# EAGLE board connectors (EAGLE 9.2.2)
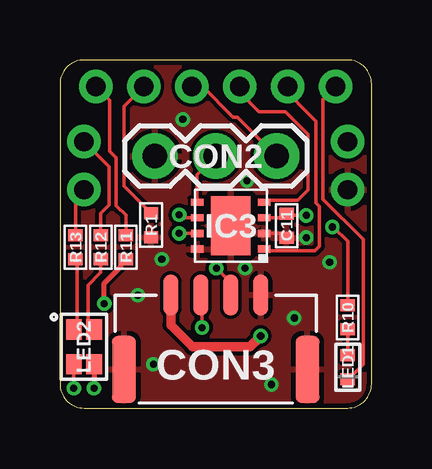
[diagram p0: board, top side]
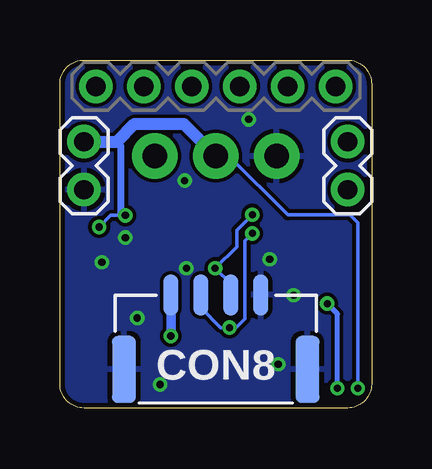
[diagram p1: board, bottom side, seen from below]

Size 13 x 14.5 mm. Coordinates in mm from the lower left corner, seen from the top.
Outline: 12,0 arc90 13,1 13,13.5 arc90 12,14.5 1,14.5 arc90 0,13.5 0,1 arc90 1,0 12,0
Copper layers (1*16): Top 0.035mm / dielectric 0.5mm / Bottom 0.035mm
Design rules "myxa *": minimum track width 0.15mm, minimum drill 0.2mm, track to track 0.15mm, track to pad 0.15mm, pad to pad 0.15mm, via to via 0.15mm, smd to smd 0.15mm, copper to edge 0.2mm, drill to drill 0.2mm, minimum pad ring 0.125mm, minimum via ring 0.125mm, stop-mask expansion 1mil, vias tented up to drill 0.31mm, thermal gap 8mil
Net classes: 1 HV: clearance 0.25 mm to class 0, clearance 0.25 mm

## Footprints (pad centres in the part's own frame; a part is rotated, then mirrored left to right if it is on the bottom)
C0402 = smd 0.5 x 0.6: 1 -0.5,0; 2 0.5,0
1X06-PTH-2 = drill 0.8 pad 1.4: 1 -5,0; 2 -3,0; 3 -1,0; 4 1,0; 5 3,0; 6 5,0
1X03-PTH-2.54-RA = drill 1.016 pad 1.88: 1 -2.54,0; 2 0,0; 3 2.54,0
JST_GH-4P-RA = smd 0.6 x 1.7: 1 1.875,-2.91; 2 0.625,-2.91; 3 -0.625,-2.91; 4 -1.875,-2.91 | smd 1 x 2.8: M$0 -3.825,0.19; M$1 3.825,0.19
1X02-PTH-2 = drill 0.8 pad 1.4: 1 -1,0; 2 1,0
SOT782-1 = smd 0.525 x 0.3: 1 -1.4,0.975; 2 -1.4,0.325; 3 -1.4,-0.325; 4 -1.4,-0.975; 5 1.4,-0.975; 6 1.4,-0.325; 7 1.4,0.325; 8 1.4,0.975 | smd 1.65 x 2.45: PAD 0,0
0402_LED = smd 0.5 x 0.6: A 0.5,0; C -0.5,0
LITE_ON_RGB_LED = smd 0.65 x 0.85: + -0.425,-0.725; B 0.425,-0.725; G 0.425,0.725; R -0.425,0.725
R0402 = smd 0.5 x 0.6: 1 -0.5,0; 2 0.5,0

## Placement (x,y rotation side)
C11  0.1µF  [C0402]  9.45,7.6 270 top
CON1  PINHEAD_1X06-2  [1X06-PTH-2]  6.5,13.4 0 bottom
CON2  PINHEAD_1X03-2.54-RA  [1X03-PTH-2.54-RA]  6.5,10.5 0 top
CON3  CON-4P-JST_GH-RA  [JST_GH-4P-RA]  6.5,1.8 180 top
CON4  PINHEAD_1X02-2  [1X02-PTH-2]  1,10.1 90 bottom
CON5  PINHEAD_1X02-2  [1X02-PTH-2]  12,10.1 90 bottom
CON8  CON-4P-JST_GH-RA  [JST_GH-4P-RA]  6.5,1.8 180 bottom
IC3  TJA1051  [SOT782-1]  7.12,7.6 180 top
LED1  GREEN  [0402_LED]  12,1.7 90 top
LED2  LTST-C19HE1WT  [LITE_ON_RGB_LED]  1,2.55 0 top
R1  1K  [R0402]  3.8,7.62 90 top
R10  1K  [R0402]  12,3.77 90 top
R11  1K  [R0402]  2.75,6.7 90 top
R12  1K  [R0402]  1.7,6.7 90 top
R13  1K  [R0402]  0.65,6.7 90 top

## Library data of the parts
C11 = C_digikey; DIGIKEY#: 490-3261-1-ND; MANF: Murata Electronics North America; MANF#: GRM155R71C104KA88D; OPERATING_TEMP: -55°C ~ 125°C; PACKAGE: 0402; TC: X7R; TOLERANCE: +-10%; VOLTAGE: 16V
CON1 CON4 CON5 = pinhead
CON2 = pinhead; DIGIKEY#: WM19494-ND; MANF: Molex, LLC; MANF#: 0022286030
CON3 CON8 = Connectors; DIGIKEY#: 455-1566-1-ND; MANF: JST Sales America Inc; MANF#: SM04B-GHS-TB(LF)(SN)
IC3 = myxa_masterlib; DIGIKEY#: 568-8686-2-ND; MANF: NXP Semiconductors; MANF#: TJA1051TK/3,118
LED1 = myxa_masterlib; COLOR: GREEN; DIGIKEY#: 511-1652-1-ND; MANF: Rohm Semiconductor; MANF#: SML-P11MTT86
LED2 = myxa_masterlib; DIGIKEY#: 160-2162-1-ND; MANF: Lite-On Inc; MANF#: LTST-C19HE1WT
R1 R10-R13 = R_digikey; DIGIKEY#: 311-1.00KLRCT-ND; MANF: Yageo; MANF#: RC0402FR-071KL; PACKAGE: 0402; TOLERANCE: 1%

## Nets
ADJ: CON1.5 R1.2
BLUE: CON1.6 R11.2
CAN1_LED: CON1.1 LED1.C
CAN1_RX: CON1.3 IC3.4
CAN1_TX: CON1.2 IC3.1
GND: C11.2 CON2.1 CON3.4 CON3.M$0 CON3.M$1 CON5.1 CON8.4 CON8.M$0 CON8.M$1 IC3.2 IC3.8 IC3.PAD R1.1
GPIO1: CON1.4 CON2.3
GREEN: CON4.2 R12.2
N$7: LED1.A R10.1
N$23: CON3.2 CON8.2 IC3.7
N$28: CON3.1 CON8.1
N$35: CON3.3 CON8.3 IC3.6
N$58: LED2.R R13.1
N$59: LED2.G R12.1
N$60: LED2.B R11.1
RED: CON4.1 R13.2
VDD_5V: C11.1 CON2.2 CON5.2 IC3.3 IC3.5 LED2.+ R10.2

## Tracks (layer width: path | path; a pad name or v marks a point on that pad's centre or on a via)
ADJ
  Top 0.152: R1.2 2.67,9.25 2.67,12.57 CON1.5
BLUE
  Top 0.15: R11.2 2.75,8.03 2.35,8.43 2.35,10.43 2.08,10.7 2.08,12.82 CON1.6
CAN1_LED
  Top 0.152: CON1.1 10.97,12.88 10.97,8.7 12.65,7.03 12.65,1.82 12.03,1.2 LED1.C
CAN1_RX
  Top 0.152: CON1.3 7.5,13.15 8.3,12.35 9.4,12.35 10.35,11.4 10.35,9.07 9.93,8.65 8.6,8.65 IC3.4
CAN1_TX
  Top 0.152: IC3.1 8.61,6.55 10.62,6.55 10.82,6.75 10.82,8.4 10.67,8.55 10.67,11.96 10.34,12.29 9.5,13.13 CON1.2
GND  (via drill 0.3 pad 0.6)
  Top 0.152: IC3.2 9.28,7.28 C11.2
  Top 0.2: 7.16,7.67 7.16,7.35
  other vias: 10.28,7.1 3.9,1.82 8.82,0.98 9.78,3.75 11.25,6.08 4.25,6.2 3.25,4.7 5.12,12.03 7.72,5.83 7.8,9.47
  pour Bottom: 13,14.53 0,14.53 0,0.02 13,0.02
  pour Top: 0,14.53 13,14.53 13,0.02 0,0.02
GPIO1
  Top 0.152: CON2.3 7.42,12.12 7.22,12.12 5.95,13.4 CON1.4
GREEN
  Top 0.15: R12.2 1.7,8.12 2.05,8.47 2.05,10.05 CON4.2
N$7
  Top 0.152: LED1.A R10.1
N$23  (via drill 0.3 pad 0.6)
  Top 0.152: IC3.7 v4.97,7.28 | CON3.2 5.92,4.66 v5.92,3.35
  Bottom 0.152: CON8.2 7.12,4.17 6.3,3.35 v5.92,3.35 5.65,3.35 5.28,3.73 5.28,6.97 v4.97,7.28
N$28  (via drill 0.3 pad 0.6)
  Top 0.4: CON3.1 4.62,3.45 5.53,2.55 7.92,2.55 v8.38,3
  Bottom 0.4: CON8.1 v8.38,3
N$35  (via drill 0.3 pad 0.6)
  Top 0.152: IC3.6 5.1,7.92 v4.97,8.05 | CON3.3 7.12,5.22 v6.53,5.83
  Bottom 0.152: v4.97,8.05 5.62,7.4 5.62,6.72 v6.53,5.83 5.88,5.17 CON8.3
N$58
  Top 0.152: LED2.R 0.72,3.42 0.72,6.12 R13.1
N$59
  Top 0.152: LED2.G 1.17,3.52 1.17,5.12 1.7,5.65 R12.1
N$60  (via drill 0.3 pad 0.6)
  Top 0.2: LED2.B v1.42,0.82 | v1.85,4.35 1.85,5.2 2.55,5.9 2.55,6 R11.1
  Bottom 0.2: v1.85,4.35 1.42,3.92 v1.42,0.82
RED
  Top 0.15: R13.2 0.65,8.75 CON4.1
VDD_5V  (via drill 0.3 pad 0.6)
  Top 0.15: LED2.+ v0.58,0.82
  Top 0.152: IC3.3 9.28,7.92 C11.1 9.53,8.03 v10.28,8.03 | IC3.5 5.72,9.72 CON2.2 | R10.2 12,6.95 11.41,7.54 v11.37,7.54
  Bottom 0.152: v11.37,7.54 10.88,8.03 v10.28,8.03 | v0.58,0.82 0.58,7.72 0.9,8.05 3.5,8.05 5.95,10.5 CON2.2
  Bottom 0.3: v10.28,8.03 10.45,8.03 10.45,10.93 10.62,11.1
  Bottom 0.5: CON5.2 10.62,11.1 9.88,11.84 7.84,11.84 CON2.2